# EAGLE board NM_soilN (EAGLE 9.7.0)

Size 186.76 x 366.19 mm. Coordinates in mm from the lower left corner, seen from the top.
Outline: 0,0 186.76,0 186.76,366.19 0,366.19 0,0
Copper layers (1*16): Top 0.035mm / dielectric 1.5mm / Bottom 0.035mm
Design rules "default": minimum track width 6mil, minimum drill 0.35mm, track to track 6mil, track to pad 6mil, pad to pad 6mil, via to via 6mil, smd to smd 6mil, copper to edge 40mil, drill to drill 6mil, minimum pad ring 10mil, minimum via ring 8mil, stop-mask expansion 4mil, vias tented up to drill 0mil, thermal gap 10mil

## Footprints (pad centres in the part's own frame; a part is rotated, then mirrored left to right if it is on the bottom)
LEDRD254W60D565H860B_G = drill 0.981 pad 1.581: 1 -1.27,0; 2 1.27,0
LEDRD254W60D565H860B_B = drill 0.981 pad 1.581: 1 -1.27,0; 2 1.27,0
LEDRD254W60D565H860B = drill 0.981 pad 1.581: 1 -1.27,0; 2 1.27,0
RESAD1016W63L850D250B = drill 0.83 pad 1.43: 1 -5.08,0; 2 5.08,0
HA-06-SM065 = drill 1 pad 1.676: 1 -2.54,-2.54; 2 0,2.54; 3 2.54,-2.54
SEN-13322 = drill 1.016 long: 1 -2.54,0; 2 0,0; 3 2.54,0
JHD-162A = drill 1.016 long: 1 -19.05,0; 2 -16.51,0; 3 -13.97,0; 4 -11.43,0; 5 -8.89,0; 6 -6.35,0; 7 -3.81,0; 8 -1.27,0; 9 1.27,0; 10 3.81,0; 11 6.35,0; 12 8.89,0; 13 11.43,0; 14 13.97,0; 15 16.51,0; 16 19.05,0
ARDUINO-UNO-R3-SHIELD = drill 1.016 pad 1.88: 3.3V 24.13,-2.54; 5V 24.13,0; A0 24.13,12.7; A1 24.13,15.24; A2 24.13,17.78; A3 24.13,20.32; A4 24.13,22.86; A5 24.13,25.4; AREF -24.13,-13.97; D2 -24.13,20.32; D3 -24.13,17.78; D4 -24.13,15.24; D5 -24.13,12.7; D6 -24.13,10.16; D7 -24.13,7.62; D8 -24.13,3.81; D9 -24.13,1.27; D10 -24.13,-1.27; D11 -24.13,-3.81; D12 -24.13,-6.35; D13 -24.13,-8.89; GND@0 24.13,2.54; GND@1 24.13,5.08; GND@2 -24.13,-11.43; IOREF 24.13,-7.62; NC 24.13,-10.16; RES 24.13,-5.08; RX -24.13,25.4; SCL -24.13,-19.05; SDA -24.13,-16.51; TX -24.13,22.86; VIN 24.13,7.62

## Placement (x,y rotation side)
D1  GREEN  [LEDRD254W60D565H860B_G]  85.76,357.32 180 top
D2  BLUE  [LEDRD254W60D565H860B_B]  92.81,358.28 180 top
D3  RED  [LEDRD254W60D565H860B]  102.1,356.68 180 top
R1  220  [RESAD1016W63L850D250B]  100.83,351.6 90 top
R2  220  [RESAD1016W63L850D250B]  84.49,352.24 90 top
R3  220  [RESAD1016W63L850D250B]  91.54,353.2 90 top
R4  220  [RESAD1016W63L850D250B]  150.19,183.21 270 top
R5  220  [RESAD1016W63L850D250B]  108.83,8.97 90 top
RPOT3  250k  [HA-06-SM065]  109.55,157.81 0 top
SEN2  SEN-13322  [SEN-13322]  18.21,123 0 top
U1  LCD-16X2JHD-162A  [JHD-162A]  131.14,135.08 0 top
U3  ARDUINO-UNO-R3-SHIELD  [ARDUINO-UNO-R3-SHIELD]  47.88,169.38 270 top

## Library data of the parts
D1 = Tinkercad; CATEGORY: Opto-Electronic; SUB-CATEGORY: LED; VALUE: LED_GREEN
D2 = Tinkercad; CATEGORY: Opto-Electronic; SUB-CATEGORY: LED; VALUE: LED_BLUE
D3 = Tinkercad; CATEGORY: Opto-Electronic; SUB-CATEGORY: LED; VALUE: LED_RED
R1-R5 RPOT3 SEN2 U1 U3 = Tinkercad

## Nets
D1_C: D1.2 R2.2
D2_C: D2.2 R3.2
D3_C: D3.2 R1.2
U1_LED+: R4.2 U1.15
U1_VO: RPOT3.2 U1.3
U3_5V: R4.1 RPOT3.1 U1.2 U3.5V
U3_A0: SEN2.1 U3.A0
U3_A1: SEN2.3 U3.A1
U3_D2: U1.14 U3.D2
U3_D3: U1.13 U3.D3
U3_D4: U1.12 U3.D4
U3_D5: U1.11 U3.D5
U3_D11: U1.6 U3.D11
U3_D12: U1.4 U3.D12
U3_GND: RPOT3.3 SEN2.2 U1.1 U1.5 U1.16 U3.GND@0 U3.GND@1 U3.GND@2

## Tracks (layer width: path | path; a pad name or v marks a point on that pad's centre or on a via)
D1_C  (1 unrouted)
D2_C  (1 unrouted)
D3_C  (1 unrouted)
U1_LED+  (1 unrouted)
U1_VO  (1 unrouted)
U3_5V  (3 unrouted)
U3_A0  (1 unrouted)
U3_A1  (1 unrouted)
U3_D2  (1 unrouted)
U3_D3  (1 unrouted)
U3_D4  (1 unrouted)
U3_D5  (1 unrouted)
U3_D11  (1 unrouted)
U3_D12  (1 unrouted)
U3_GND  (7 unrouted)